# Altium PCB miniPPG_II.PcbDoc
Units mil, origin at the board's own origin, x right, y up, seen from the top; angles counter-clockwise.
Board outline 250 x 220 mil, 2 copper layers (Top Layer, Bottom Layer); 25 components, 19 nets, 69 pads, 21 vias.
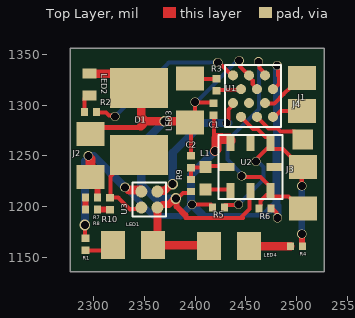
[diagram p0: Top Layer view]
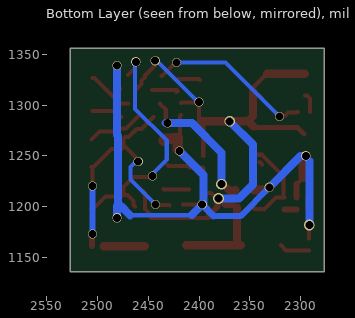
[diagram p1: Bottom Layer view, seen from below]

## Layer stack, top to bottom
Top Solder: solder mask 0.4, Solder Resist, Dk 3.5
Top Layer: signal copper 1.4
Dielectric 1: dielectric 12.6, FR-4, Dk 4.8
Bottom Layer: signal copper 1.4
Bottom Solder: solder mask 0.4, Solder Resist, Dk 3.5

## Board outline
2277,1136 2277,1356 2527,1356 2527,1136

## Design rules (kind name [scope] priority, off if disabled: settings)
Clearance [All] p1: gap=4 ignorepadtopadclearanceinfootprint=FALSE except(0: Arc-Text Arc-Hole Track-Text Track-Hole SMDPad-Text SMDPad-Hole THPad-Text THPad-Hole Via-Text Via-Hole Fill-Text Fill-Hole Poly-Text Poly-Hole Region-Text Region-Hole Text-Text Text-Hole; 3.9: SMDPad-SMDPad; 5.91: Arc-Via Track-Via SMDPad-Via; 9.84: Via-Via)
HoleToHoleClearance [All] p1: gap=4 allowstackedmicrovias=TRUE
MinimumSolderMaskSliver [All] p1: minsoldermaskwidth=3.92
PolygonConnect [All] p1: connectstyle=Relief reliefconductorwidth=10 reliefentries=4 polygonreliefangle="90 Angle" airgapwidth=10
RoutingVias [All] p1: holewidth=28 width=50 viastyle="Through Hole" minholewidth=28 minwidth=50 maxholewidth=28 maxwidth=50
SilkToSilkClearance [All] p1: silktosilkclearance=0
SilkToSolderMaskClearance [IsPad] p1: minsilkscreentomaskgap=0 clearancetoexposedcopper=TRUE
SolderMaskExpansion [All] p1: expansion=0 istentingtop=FALSE
Width [All] p1: maxlimit=10 minlimit=4 preferedwidth=4 minimp=50.000000 maximp=50.000000 favimp=50.000000
26 further rules are at their usual default settings.

## Components (designator, comment, footprint, x,y, rotation, side; value= is the part's Value field where it differs from the comment)
C1 "0.1 uF" 01005 2418,1295.91 r0 top
C2 "0.1 uF" 01005 2396,1244.09 r0 top
D1 "Photodiode" FP-6_541-5064_01-4-MFG 2345,1282 r90 top
J1 "0402" 0402#1 2505,1307 r180 top
J2 "0402" 0402#2 2297,1252 r0 top
J3 "0402" 0402#3 2505,1240 r0 top
J4 "RSTPAD" RSTPAD 2506,1266 r0 top
L1 "Antenna Header" 0402#4 2410,1243 r0 top
LED1 "IR" 0402#5 2339,1162 r270 top value="IR LED"
LED2 "Red" 0201 2296,1320 r0 top
LED3 "IR" 0402#6 2395,1305 r180 top value="IR LED"
LED4 "IR" 0402#5 2433.59,1161.09 r90 top value="IR LED"
R1 "220" 01005 2292,1162.91 r180 top
R2 "220" 01005 2296.91,1293 r90 top
R3 "220" 01005 2421,1319.91 r0 top
R4 "220" 01005 2499.91,1161 r90 top
R5 "4.7k" 01005 2423.09,1199 r270 top value="0.1 uF"
R6 "4.7k" 01005 2468.91,1198 r90 top value="0.1 uF"
R7 "Ohms" 01005 2298.09,1209 r90 top value=1M
R8 "1M" 01005 2298.09,1197 r270 top
R9 "220" 01005 2396,1220.91 r180 top
R10 "1M" 01005 2316,1202.91 r0 top
U1 "ATTiny20" Large_attiny 2460.13,1303.36 r0 top
U2 "NFC" NFC 2454.62,1239 r270 top
U3 "opamp buffer" opamp 2355,1207 r90 top

## Footprints (in the part's own frame and the unit in brackets; to place one, negate y for a bottom-side part, rotate by r counter-clockwise, add the part's x,y. Pads: shape width x height; smd on the part's side, far side on the other; paste and mask are expansions set on the pad)
0201 [mm]
  rect 0.35x0.25 smd: 0(0,0.275) 1(0,-0.275)
0402#1 [mm]
  rect 0.7x0.6 smd: 0(0,0.33) 1(0,-0.5)
0402#2 [mm]
  rect 0.7x0.6 smd: 0(0,0.5) 1(0,-0.584)
0402#3 [mm]
  rect 0.7x0.6 smd: 0(0.025,-0.025) 1(0.025,-1.067)
0402#4 [mm]
  rect 0.3x0.3 smd: 0(0,-0.102) 1(0,-0.66)
0402#5 [mm]
  rect 0.7x0.6 smd: 0(0,0.5) 1(0,-0.5)
0402#6 [mm]
  rect 0.7x0.6 smd: 0(0,0.559) 1(0,-0.533)
01005 [mm]
  rect 0.2x0.18 smd: 0(0,0.15) 1(0,-0.15)
FP-6_541-5064_01-4-MFG [mm]
  rect 1x1.45 smd paste+0 mask+0: 1(-0.786,0) 2(0.889,0)
  body extent -1.4,-0.82 1.4,0.82, height 0.25
Large_attiny [mm]
  round 0.25 smd: 1A(-0.581,0.658) 1C(-0.581,-0.035) 2B(-0.381,0.312) 2D(-0.381,-0.381) 3A(-0.181,0.658) 3C(-0.181,-0.035) 4B(0.019,0.312) 4D(0.019,-0.381) 5A(0.219,0.658) 5C(0.219,-0.035) 6B(0.419,0.312) 6D(0.419,-0.381)
  silkscreen extent -0.78,-0.64 0.62,0.92
NFC [mm]
  rect 0.4x0.2 smd: 1(0.6,-0.5) 2(0.6,0) 3(0.6,0.5) 5(-0.6,0.5) 6(-0.6,0) 7(-0.6,-0.5)
  rect 0.2x0.4 smd: 4(0,0.6) 8(0,-0.6)
  silkscreen extent -0.8,-0.8 0.8,0.8
opamp [mm]
  round 0.3 smd: 1A(-0.2,0.2) 1B(-0.2,-0.2) 2A(0.2,0.2) 2B(0.2,-0.2)
  silkscreen extent -0.42,-0.42 0.42,0.42
RSTPAD [mil]
  rect 20x20 smd: 0(0,0)

## Part data
C1 C2 R5 R6: library part 01005, "01005 Component", MPN=CL02A104KQ2NNNC
D1: library part CMP-02531-000004-1, "0805 PHOTODIODE / temd7000x01", Ambient Temperature Range High=+100°C, Ambient Temperature Range Low=-40°C, Dark Current=0.0001uA, Manufacturer=Vishay, MPN=TEMD6200FX01, Package=6.541-5064.01-4, Power Dissipation=100mW, Reverse Breakdown Voltage=16V, Temperature="-40°C to +100°C", Automotive=Yes, Automotive Grade="Grade 3", Category=Diode, ComponentLink2Description=Datasheet, ComponentLink2URL=http://www.vishay.com/docs/81812/temd6200.pdf, Device Class L1=Sensors, Device Class L2="Optical Sensors", Device Class L3=Photodiodes, Digikey Description="SENSOR PHOTODIODE 540NM 0805", Height=0.95mm, Lead Free=Yes, Max Junction Temp=+100°C, Mouser Description="Ambient Light Sensors 16V 100mW 60Deg AEC-Q101 Qualified", Octopart=https://octopart.com/temd6200fx01-vishay-19158932, RoHS=TRUE, Sensor Output=Photodiode, Temperature Range High=+100°C, Temperature Range Low=-40°C, Viewing Angle=120°
J1 J2 J3: "0402 Component"
L1: library part 0402, "0402 Component"
LED1 LED3 LED4: library part 0402, "0402 Component / SFH 4043", MPN="SFH 4043"
LED2: library part 0201, "0201 Component / XZMDR155W", MPN=XZMDR155W
R1 R2 R3 R4 R9: library part 01005, "01005 Component / CRCW0100220RFREL", MPN=CRCW0100220RFREL
R7: library part 01005, "01005 Component / CRCW01001M00FREL / <Placeholder if more gain is necessary>", MPN=CRCW01001M00FREL
R8 R10: library part 01005, "01005 Component / CRCW01001M00FREL", MPN=CRCW01001M00FREL
U3: library part Op-amp

## Free pads (board coordinates)
  round 10 on Top Overlay: ""(2423,1228) ""(2447,1324)

## Via types
v1: diameter 9, hole 7.87, Top Layer to Bottom Layer, tented both sides, 11 vias
v2: diameter 10.5, hole 7.87, Top Layer to Bottom Layer, tented both sides, 4 vias
v3: diameter 9.5, hole 7.87, Top Layer to Bottom Layer, tented both sides, 3 vias
v4: diameter 9, hole 7.87, Top Layer to Bottom Layer, tented top, 1 vias
v5: diameter 8.5, hole 7.87, Top Layer to Bottom Layer, tented both sides, 1 vias
v6: diameter 8.8, hole 7.87, Top Layer to Bottom Layer, tented both sides, 1 vias

## Nets (pads, with @x,y where several pads share a name; then routed paths per layer and width w, separated by ;. In a path a pad name is that pad's centre, name@x,y a point inside that pad or via, vN(x,y) a via of type N, cw(c..) or ccw(c..) an arc to the next point about the centre after c; other vN are vias at no path point)
Ant: C2.1 L1.0 R9.1 U2.8 | length 47.6
  Top Layer w4: R9.1 C2.1 2396.41,1238.59 2409.41,1238.59 2409.5,1238.5 L1.0 2411,1240 2430,1240 U2.8@2431,1241
GND: C1.0 C2.0 D1.2 J2.0 LED1.0 LED2.0 LED3.0 LED4.0 R9.0 U1.3A U1.4B U2.2 U3.1B | length 731.4
  Top Layer w4: D1.2@2333.17,1330.83 D1.2@2347,1317 ; D1.2@2338.3,1306.3 2347,1315 D1.2@2347,1313.5 ; D1.2@2344.79,1314 D1.2@2345.29,1313.5 ; 2346.22,1278.51 2346.43,1278.73 ; LED1.0 LED1.0@2362.87,1166.19 ; U3.1B 2364.99,1199.13 U3.1B@2367.86,1202 ; v2(2381,1208) 2382.76,1208 2388.22,1213.46 2394.46,1213.46 R9.0 ; 2390.5,1189 2447.22,1189 ; C2.0 2396,1280 LED3.0@2399,1283 ; LED3.0@2398,1284 LED3.0@2399,1283 ; LED3.0@2400,1284 v1(2400,1303) 2400.59,1302.41 2417.41,1302.41 C1.0 ; LED3.0@2400.97,1283 LED3.0@2399,1283 ; LED4.0@2413,1162 LED4.0 ; v3(2443.3,1343.62) 2444.35,1342.57 2444.35,1337.91 2452.63,1329.63 2453.37,1329.63 2453.37,1327.35 2456.72,1324 2456.72,1320.91 U1.4B@2462.11,1315.51 ; 2445.97,1190.25 2453.46,1197.74 U2.2@2453.46,1213.44 ; U2.2@2454.62,1213.44 U2.2
  Top Layer w5: J2.0 2303.33,1278.01 2345.72,1278.01 2346.22,1278.51
  Top Layer w6: v2(2381,1208) 2381.86,1207.14 2381.86,1200.14 2390.5,1191.5
  Top Layer w7: U3.1B@2367.86,1202 2374.05,1202 2380.05,1208 v2(2381,1208)
  Top Layer w8: LED2.0 D1.2@2333.17,1330.83 ; 2346.43,1278.73 2346.65,1278.73 2351.92,1284 ; D1.2@2347,1313.5 2347,1288.92 2351.92,1284 ; LED1.0 LED4.0@2413,1162 ; LED1.0@2362.87,1166.19 U3.1B ; LED3.0@2398,1284 v2(2370,1284) 2351.92,1284
  Bottom Layer w4: v1(2400,1303) 2401.34,1303 2441.96,1343.62 v3(2443.3,1343.62)
  Bottom Layer w8: v2(2370,1284) 2347,1261 2347,1221.91 2360.91,1208 v2(2381,1208)
LED1: R2.1 U1.1A | length 163.5
  Top Layer w4: R2.1 2304.05,1293 2304.35,1292.7 2312.35,1292.7 2315.22,1289.83 2320.08,1289.83 v6(2321,1288.91) ; v1(2422.3,1342) 2423.41,1342 2436.79,1328.62 U1.1A@2437.14,1328.62
  Bottom Layer w4: v6(2321,1288.91) 2374.09,1342 v1(2422.3,1342)
LED2: R3.1 U1.2B | length 27.5
  Top Layer w4: R3.1@2422.1,1312.9 R3.1 2421.86,1314.86 2446.37,1314.86 U1.2B@2446.5,1315
NetL1_1: L1.1 U2.1 | length 25.1
  Top Layer w4: L1.1 2434.56,1217 U2.1@2434.94,1217.38
NetLED1_1: LED1.1 R1.0 | length 29.4
  Top Layer w4: R1.0 2314.32,1157 LED1.1
NetLED2_1: LED2.1 R2.0 | length 19.4
  Top Layer w4: R2.0 2291.11,1293.11 2291.11,1306.25 2294.03,1309.17 LED2.1
NetLED3_1: LED3.1 R3.0 | length 22.5
  Top Layer w4: LED3.1@2399,1324.68 2400.13,1325.81 R3.0
NetLED4_1: LED4.1 R4.0 | length 40.8
  Top Layer w4: LED4.1 LED4.1@2453.37,1161
  Top Layer w8: LED4.1@2453.37,1161 R4.0
NetR7_0: R7.0 R8.1 | length 12
  Top Layer w6: R8.1 R7.0
NetR8_0: R8.0 R10.1 | length 12.1
  Top Layer w6: R8.0 R10.1
PD: D1.1 R10.0 U3.1A | length 100.2
  Top Layer w4: D1.1@2338.14,1241.65 D1.1@2340.36,1243.86 ; D1.1@2347,1251.04 2338.14,1251.04 2316.78,1229.68 2316.78,1209.59 R10.0 2324.35,1208.81 2336.04,1197.13 2336.54,1197.63 2345.63,1197.63 U3.1A
PD_BUFF: U1.1C U3.2B | length 138.3
  Top Layer w4: U3.2B U3.2B@2364.37,1216.37 ; 2372.12,1217.86 2376.45,1222.19 v2(2378,1222.19) ; v5@2432.86,1282.14 2432.86,1295.39 2438.63,1301.16 U1.1C@2438.63,1301.36
  Top Layer w8: U3.2B@2364.12,1216.12 2364.63,1215.6 2369.86,1215.6 2372.12,1217.86
  Bottom Layer w8: v2(2378,1222.19) 2378,1253 2407.14,1282.14 v5@2432.86,1282.14
  other v5: 2431,1282.14
RST: J4.0 U1.4D | length 54.4
  Top Layer w4: U1.4D 2472.23,1277 2481,1277 2484,1274 2498,1274 J4.0
SCL: J3.1 R6.0 U1.5A U2.3 | length 242.7
  Top Layer w4: v1(2445.9,1230.28) 2446.85,1229.32 2450.39,1229.32 2450.46,1229.25 2464.37,1229.25 2474.31,1219.32 U2.3@2474.31,1213.44 ; v1(2462.36,1342.57) 2463.32,1341.61 2463.32,1336.28 U1.5A@2470.13,1329.47 ; R6.0@2463,1200 2464.54,1201.54 2464.54,1205.7 2470.35,1211.5 2472.37,1211.5 U2.3@2474.31,1213.44 ; J3.1 2504.03,1198 2492.09,1209.94 2476.24,1209.94 2474.31,1211.87 U2.3@2474.31,1213.44
  Bottom Layer w4: v1@2445.9,1232.28 2431.88,1246.29 2431.88,1264.88 2462.96,1295.96 2462.96,1341.97 v1(2462.36,1342.57)
SDA: J3.0 R4.1 R5.0 U1.2D U2.5 | length 256.9
  Top Layer w4: R5.0@2429,1201 2429.5,1201.5 2442.37,1201.5 v1(2442.87,1202) ; U1.2D 2456.99,1276.5 2461.42,1276.5 2469.42,1268.5 2472.37,1268.5 2474.31,1266.56 U2.5 U2.5@2474.31,1260.68 ; v1@2460,1246.38 U2.5@2474.31,1260.68 ; v4(2505,1220.22) 2505,1238 J3.0 2504.03,1239 2486.28,1256.75 2476.24,1256.75 2474.31,1258.68 U2.5@2474.31,1260.68 ; R4.1@2505.41,1161.41 R4.1
  Top Layer w6: v1(2505,1173) 2505.41,1172.59 R4.1@2505.41,1161.41
  Bottom Layer w4: v1(2442.87,1202) 2467.5,1226.63 2467.5,1238.88 v1@2460,1246.38
  Bottom Layer w6: v1(2505,1173) v4(2505,1220.22)
  other v1: 2460,1244.38
TPICLK: J1.0 U1.6D | length 30.7
  Top Layer w4: U1.6D 2478.2,1288.36 2483.84,1294 J1.0
TPIDATA: J1.1 U1.5C | length 45.4
  Top Layer w4: U1.5C@2470.13,1301.36 2470.26,1301.5 2477.92,1301.5 2487.54,1311.12 2487.54,1311.2 2493.22,1316.87 2503.03,1326.68 J1.1
VCC: C1.1 J2.1 R1.1 R5.1 R6.1 R7.1 U1.6B U2.7 U3.2A | length 679
  Top Layer w4: v2(2291.48,1181.92) 2291.74,1181.66 2291.74,1169.07 R1.1 ; J2.1 J2.1@2304,1222 ; U3.2A@2345.73,1216.27 U3.2A ; v1(2397,1202) 2415.65,1202 R5.1@2415.8,1202.16 ; C1.1 2418.74,1289.26 2418.74,1255.42 v1(2419.47,1254.68) ; R6.1@2474.81,1200 2474.81,1199.61 2480.04,1194.37 2480.04,1191.96 v1@2481,1191 ; U1.6B@2478,1315.66 2478,1316.45 2482.45,1320.91 2482.45,1328.52 2481.78,1329.2 2481.78,1337.82 v1(2480.82,1338.78)
  Top Layer w6: R7.1 J2.1@2304,1222
  Top Layer w9: 2335.22,1216.27 U3.2A@2345.73,1216.27
  Top Layer w10: J2.1 v3@2297,1246.65 ; v1(2419.47,1254.68) 2421,1256.21 2421,1267.51 2425.7,1267.51 2426.48,1266.73 2433.87,1266.73 2434.94,1265.67 U2.7@2434.94,1264.62
  Bottom Layer w4: 2407.26,1191.74 2407.26,1191.5 2468.1,1191.5
  Bottom Layer w6: v3(2331,1219) 2359.25,1190.75 2385.75,1190.75
  Bottom Layer w7: 2385.75,1190.75 v1(2397,1202)
  Bottom Layer w8: v2(2291.48,1181.92) 2291.48,1245 ; v3(2295,1250) 2295.29,1249.71 2300.29,1249.71 v3(2331,1219) ; v1@2395.81,1202.96 2395.81,1231.01 v1(2419.47,1254.68) ; v1(2397,1202) 2407.26,1191.74 ; 2468.1,1191.5 2476.6,1200 ; 2479.18,1202.58 2481,1200.76 v1@2481,1191 ; 2480.03,1203.44 2480.03,1269.74 2480.82,1270.53 v1(2480.82,1338.78)
  other v1: 2481,1189
pads on no net: U1.3C U2.4 U2.6

## Silkscreen, mask and mechanical layers (free items; w line width, h text height)
Mechanical 1:
  the board outline again, w2